# Altium PCB MCPS Power 030307.PcbDoc
Units mm, origin at the board's own origin, x right, y up, seen from the top; angles counter-clockwise.
Board outline 144.17 x 67.63 mm, 2 copper layers (Top Layer, Bottom Layer); 51 components, 23 nets, 114 pads, 4 vias.
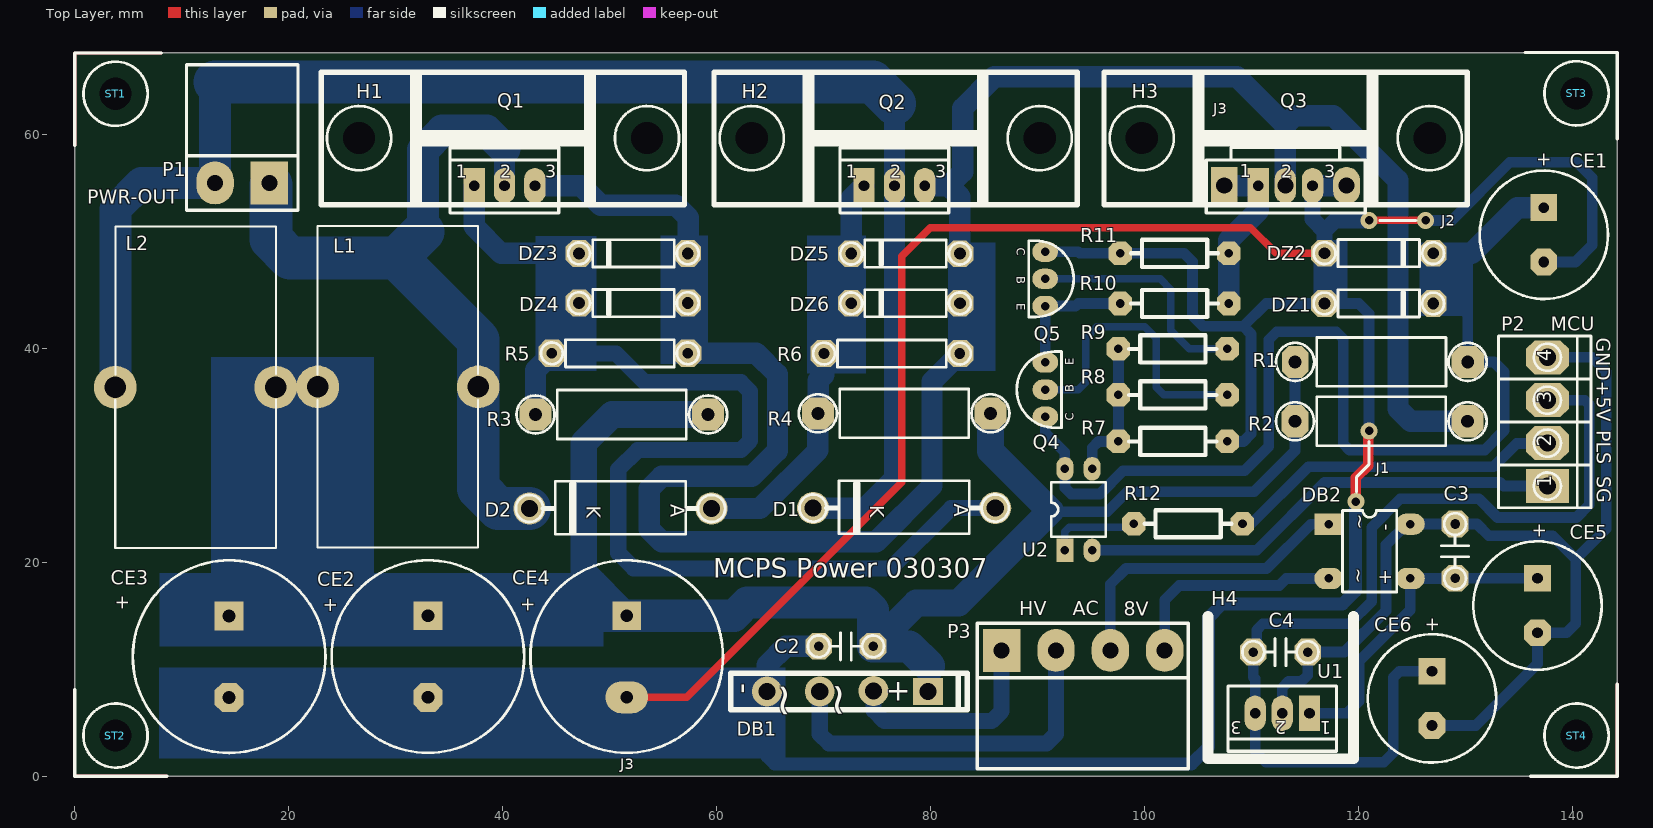
[diagram p0: Top Layer view]
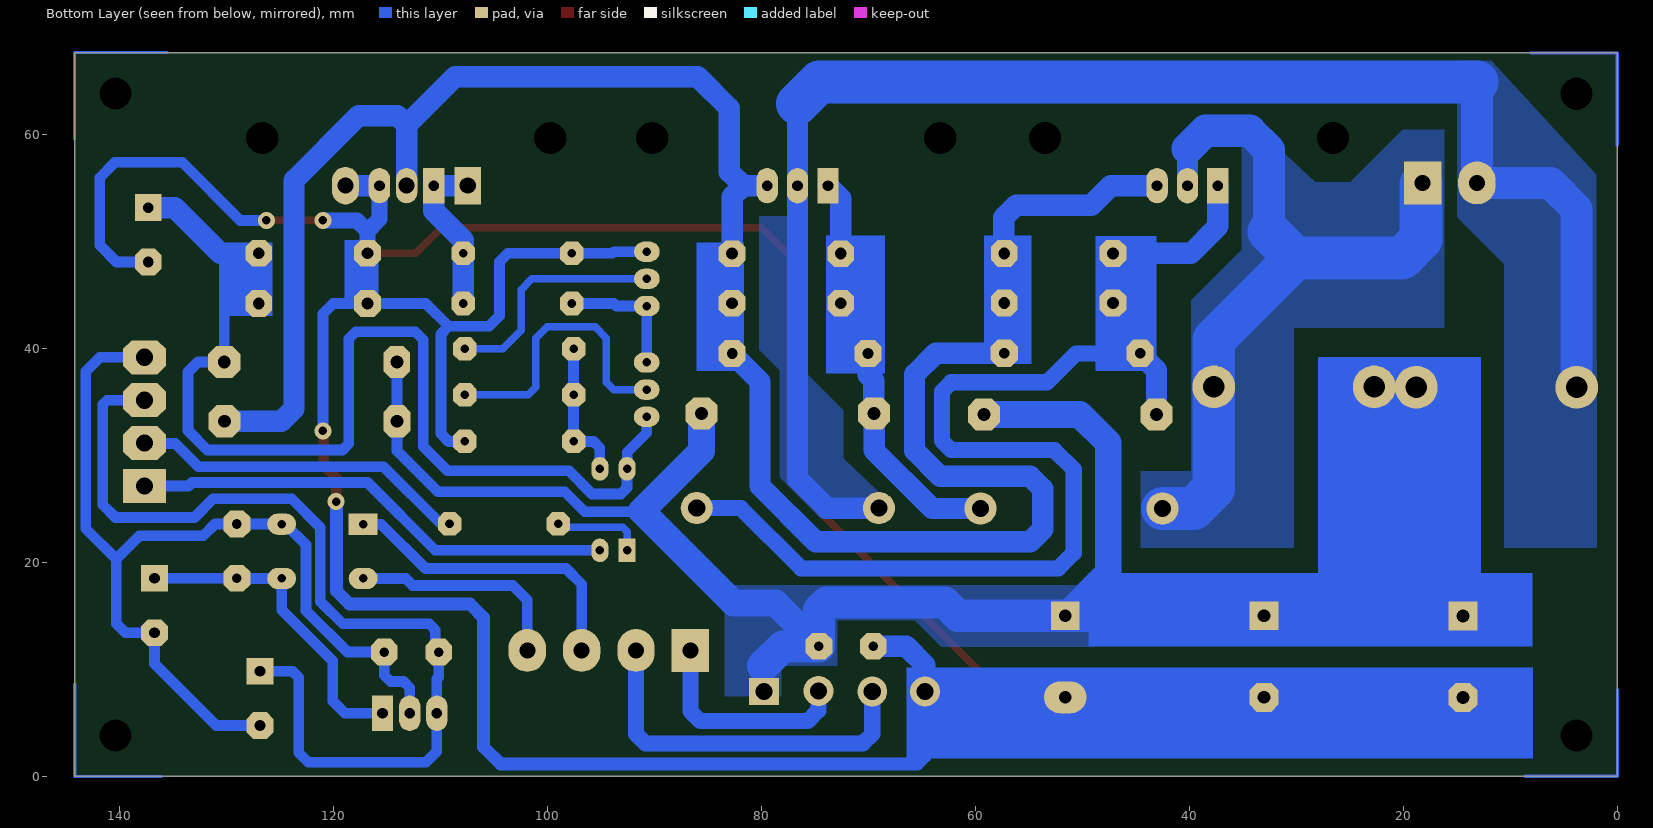
[diagram p1: Bottom Layer view, seen from below]

## Layer stack, top to bottom
Top Solder: solder mask 0.0102, Solder Resist, Dk 3.5
Top Layer: signal copper 0.0356
Dielectric1: dielectric 0.32, FR-4, Dk 4.8
Bottom Layer: signal copper 0.0356
Bottom Solder: solder mask 0.0102, Solder Resist, Dk 3.5

## Board outline
0,-0.01 0,67.62 144.17,67.62 144.17,-0.01

## Design rules (kind name [scope] priority, off if disabled: settings)
Clearance [All] p1: gap=0.3 ignorepadtopadclearanceinfootprint=FALSE
ComponentClearance [All] p1 off: gap=0.254 collisioncheckmode=3 verticalgap=0.254 showdistances=FALSE
PolygonConnect [All] p1: connectstyle=Direct reliefconductorwidth=1 reliefentries=4 polygonreliefangle="90 Angle" airgapwidth=0.3
RoutingVias [All] p1: holewidth=0.711 width=1.27 viastyle="Through Hole" minholewidth=0.711 minwidth=1.27 maxholewidth=0.711 maxwidth=1.27
SilkToSolderMaskClearance SilkscreenOverComponentPads [IsPad] p1: minsilkscreentomaskgap=0.254 clearancetoexposedcopper=TRUE
SolderMaskExpansion [All] p1: expansion=0.102 istentingtop=FALSE
UnRoutedNet [All] p1: checkbadconnections=TRUE
Width [All] p1: maxlimit=5 minlimit=0.3 preferedwidth=0.7 minimp=50.000000 maximp=50.000000 favimp=50.000000
27 further rules are at their usual default settings.

## Components (designator, comment, footprint, x,y, rotation, side; value= is the part's Value field where it differs from the comment)
C2 "100N" c2P 74.62,12.15 r180 top
C3 "100N" c2P 129.01,18.5 r90 top
C4 "100N" c2P 110.15,11.61 r0 top
CE1 "470M/25" cap2p12 137.33,53.15 r0 top
CE2 "4700M/50" CAP3P5#1 33.01,14.85 r0 top
CE3 "4700M/50" CAP3P5#1 14.43,14.838 r0 top
CE4 "4700M/50" CAP3P5#2 51.59,14.85 r0 top
CE5 "1000M/25" cap2p12 136.735,18.5 r0 top
CE6 "220M/25" cap2p12 126.88,9.82 r0 top
D1 "1N5822" D54 86.03,25.07 r270 top
D2 "1N5822" D54 59.52,25.03 r270 top
DB1 "4Amp" "BRG GBU" 64.703,7.93 r270 top
DB2 "4Amp" "BRG F" 121.02,21.03 r90 top
DZ1 "18V" D4P 116.801,44.191 r180 top
DZ2 "18V" D4P 116.801,48.89 r180 top
DZ3 "18V" D4P 57.297,48.872 r0 top
DZ4 "18V" D4P 57.297,44.232 r0 top
DZ5 "18V" D4P 82.73,48.85 r0 top
DZ6 "18V" D4P 82.73,44.21 r0 top
H1 "HeatSink-Q1" heatsink2 56.957,65.782 r90 top
H2 "HeatSink-Q2" heatsink2 93.66,65.782 r90 top
H3 "HeatSink-Q3" heatsink2 130.109,65.782 r90 top
H4 "HeatSink-U1" heatsink5 115.282,5.977 r180 top
L1 "100uH/1A" Inductor-Brown 37.681,29.684 r90 top
L2 "100uH/1A" Inductor-Brown 3.819,43.066 r270 top
P1 "120Vpp/10KHz" 2EDG 19.24,75.409 r0 top
P2 "MCU" DSIP4 137.64,27.124 r180 top
P3 "40,8 Vac" 4EDG 86.63,11.76 r180 top
Q1 "" TO220T#1 37.626,55.198 r0 top
Q2 "IRFP4568" TO220T#2 74.075,55.198 r0 top
Q3 "" TO220T#3 110.61,55.2 r0 top
Q4 "BC337" CBE-BC546 90.71,38.68 r180 top
Q5 "BC327" CBE-BC546 90.7,43.95 r0 top
R1 "1K/1W" w1#1 122.125,38.73 r0 top
R2 "2K2/1W" w1#1 122.114,33.18 r0 top
R3 "2K2/1W" w1#2 51.134,33.816 r180 top
R4 "2K2/1W" w1#2 77.523,33.921 r180 top
R5 "10K" R5P 44.597,39.533 r0 top
R6 "10K" R5P 82.73,39.51 r180 top
R7 "2K2" R4P 97.55,31.3 r90 top
R8 "220R" R4P 97.55,35.64 r90 top
R9 "220R" R4P 97.55,39.94 r90 top
R10 "47R" R4P 97.71,44.19 r90 top
R11 "10K" R4P 97.71,48.88 r90 top
R12 "470R" R4P 109.14,23.6 r270 top
ST1 "STUD" CORNER 0.01,67.6 r0 top
ST2 "STUD" CORNER 0,0 r90 top
ST3 "STUD" CORNER 144.17,67.64 r270 top
ST4 "STUD" CORNER 144.17,0 r180 top
U1 "LM7805" TO220T#4 115.4,5.89 r180 top
U2 "PC817" DIP4 92.55,21.12 r90 top

## Footprints (in the part's own frame and the unit in brackets; to place one, negate y for a bottom-side part, rotate by r counter-clockwise, add the part's x,y. Pads: shape width x height; smd on the part's side, far side on the other; paste and mask are expansions set on the pad)
2EDG [mm]
  rect 3.5x4 hole 1.5: 1(-1.045,-19.957)
  oval 3.5x4 hole 1.5: 2(-6.125,-19.957)
  silkscreen extent -8.79,-22.5 1.62,-8.91
4EDG [mm]
  rect 3.5x4 hole 1.5: 1(0,0)
  oval 3.5x4 hole 1.5: 2(-5.08,0) 3(-10.16,0) 4(-15.24,0)
  silkscreen extent -17.44,-2.54 2.29,11.05
"BRG F" [mm]
  rect 2x2.7 hole 0.8: 1(2.54,3.81)
  oval 2x2.7 hole 0.8: 2(2.54,-3.81) 3(-2.54,3.81) 4(-2.54,-3.81)
  silkscreen extent -3.81,-2.54 3.81,2.54
"BRG GBU" [mm]
  round 2.8 hole 1.6: 1(0,4.928) 2(0,0) 3(-0.051,9.957)
  rect 2.5x2.8 hole 1.6: 4(0,15.037)
  silkscreen extent -1.7,-3.41 1.7,18.69
c2P [mm]
  oct 2.5x2.5 hole 0.9: 1(0,0) 2(5.08,0)
  silkscreen extent -1.02,-1.27 6.09,1.27
cap2p12 [mm]
  rect 2.5x2.5 hole 1: 1(-0.025,0)
  oct 2.5x2.5 hole 1: 2(-0.025,-5.08)
  silkscreen extent -6.02,-8.54 5.97,3.46
CAP3P5#1 [mm]
  rect 2.7x2.7 hole 1.2: 1(0,0.152)
  oct 2.7x2.7 hole 1.2: 2(0,-7.468)
  silkscreen extent -9,-12.66 9,5.34
CAP3P5#2 [mm]
  rect 2.7x2.7 hole 1.2: 1(0,0.152)
  oval 4x3 hole 1.2: 2(0,-7.468)
  silkscreen extent -9,-12.66 9,5.34
CBE-BC546 [mm]
  oval 2.4x1.9 hole 0.8: 1(0,2.54) 2(0,0) 3(0,5.08)
  silkscreen extent -1.52,-1.02 2.67,6.1
CORNER [mm]
  round 2 hole 3: 1(3.81,-3.81)
  Multi-Layer lines w0.3: 0,-8.623 0,0.013 8.09,0.013
  silkscreen extent 0,-8.62 8.09,0.01
D4P [mm]
  oct 2.5x2.5 hole 1.1: 1(0,0) 2(-10.16,0)
  silkscreen extent -11.18,-1.27 1.01,1.27
D54 [mm]
  round 3 hole 1.6: 1(0,0) 2(0,-17.018)
  silkscreen extent -2.54,-18.28 2.41,1.27
DIP4 [mm]
  rect 2.2x1.6 hole 0.8: 1(0,0)
  oval 2.2x1.6 hole 0.8: 2(0,-2.54) 3(7.62,-2.54) 4(7.62,0)
  silkscreen extent 1.27,-3.81 6.35,1.27
DSIP4 [mm]
  rect 4x3.175 hole 1.6: 1(0,0)
  oct 4x3.175 hole 1.6: 2(0,-4.013) 3(0,-8.026) 4(0,-12.04)
  silkscreen extent -4.06,-14.02 4.57,2.03
heatsink2 [mm]
  round 0 hole 3: 5(-6.139,30.38) 5(-6.139,3.47)
  silkscreen extent -12.37,-0.04 0.03,33.91
heatsink5 [mm]
  silkscreen extent -4.23,-8.97 9.37,4.33, body extent -3.88,-8.83 9.33,3.87, height 20.32
Inductor-Brown [mm]
  round 4 hole 2: 1(6.706,14.961) 2(6.706,-0.025)
  silkscreen extent -8.3,-0.03 21.74,15
R4P [mm]
  oct 2.2x2.2 hole 0.8: 1(0,0) 2(0,-10.16)
  silkscreen extent -1.27,-9.14 1.27,-1.02
R5P [mm]
  oct 2.54x2.54 hole 1: 1(0,0) 2(12.7,0)
  silkscreen extent -1.01,-1.27 13.72,1.27
TO220T#1 [mm]
  rect 2x3.3 hole 1: 1(-0.296,0.002)
  oval 2x3.3 hole 1: 2(2.54,0) 3(5.384,0.002)
  silkscreen extent -2.54,-2.54 7.62,3.56
TO220T#2 [mm]
  rect 2x3.3 hole 1: 1(-0.305,0.002)
  oval 2x3.3 hole 1: 2(2.54,0) 3(5.375,0.002)
  silkscreen extent -2.54,-2.54 7.62,3.56
TO220T#3 [mm]
  rect 2x3.3 hole 1: 1(0,0)
  oval 2x3.3 hole 1.5: 2(2.54,0)
  oval 2x3.3 hole 1: 3(5.08,0)
  silkscreen extent -4.86,-2.54 10.01,3.56
TO220T#4 [mm]
  rect 2x3.3 hole 1: 1(0,0)
  oval 2x3.3 hole 1: 2(2.54,0) 3(5.08,0)
  silkscreen extent -2.54,-2.54 7.62,3.56
w1#1 [mm]
  oct 2.5x3 hole 1.2: 1(-8.064,0)
  oct 3x3 hole 1.2: 2(8.064,0)
  silkscreen extent -9.84,-2.29 9.84,2.29
w1#2 [mm]
  oct 3x3 hole 1.2: 1(-8.064,0) 2(8.064,0)
  silkscreen extent -9.84,-2.29 9.84,2.29

## Part data
C2 C3 C4: library part C
CE1 CE2 CE3 CE4 CE5 CE6: library part E
D1 D2: library part D
DB1 DB2: library part BRIDGE
DZ1 DZ2 DZ3 DZ4 DZ5 DZ6: library part DZ
H1 H2 H3 H4 P1: library part "Header 2", "Header, 2-Pin", LatestRevisionDate=17-Jul-2002, LatestRevisionNote="Re-released for DXP Platform.", Publisher="Altium Limited"
L1 L2: library part INDUCTOR
P2 P3: library part "Header 4", "Header, 4-Pin", LatestRevisionDate=17-Jul-2002, LatestRevisionNote="Re-released for DXP Platform.", Publisher="Altium Limited"
Q1 Q2 Q3: library part "MOSFET N"
Q4: library part BC546
Q5: library part M6, "PNP", DatasheetVersion=1997, LatestRevisionDate=15-Jan-2003, LatestRevisionNote="PCB Footprint 'BCY-W3/D4.7' replaced", PackageDescription="TO, Flat Index; 3 In-Line, Axial Leads; Body Dia. 4.5mm; Leads 0.51 x 0.48 mm (max)", PackageReference=TO-92A, PackageVersion=Sep-1998, Published=8-Jun-2000, Publisher="Altium Limited"
R1 R2 R3 R4 R5 R6 R7 R8 R9 R10 R11 R12: library part R
U1: library part Regulator, "SMD"
U2: library part OPTODIP4

## Free pads (board coordinates)
  rect 2.5x3.5 hole 1.5: 2(107.435,55.2)
  oval 2.5x3.5 hole 1.5: 3(118.865,55.2)

## Via types
v1: diameter 1.6, hole 0.8, Top Layer to Bottom Layer, 4 vias

## Nets (pads, with @x,y where several pads share a name; then routed paths per layer and width w, separated by ;. In a path a pad name is that pad's centre, name@x,y a point inside that pad or via, vN(x,y) a via of type N, cw(c..) or ccw(c..) an arc to the next point about the centre after c; other vN are vias at no path point)
5V: C4.1 CE6.1 P2.3 U1.3 | length 91
  Bottom Layer w1: 110.32,2.3 110.32,2.334 ; CE6.1 123.816,9.82 123.23,9.234 123.23,2.2 122.34,1.31 111.344,1.31 110.32,2.334 ; P2.3 141.14,35.15 141.55,34.74 141.55,25.38 140.36,24.19 132.976,24.19 131.236,25.93 123.88,25.93 121.21,23.26 121.21,16.34 119.12,14.25 111.048,14.25 110.462,13.664 110.462,11.922 C4.1 110.15,9.29 110.32,9.12 U1.3 110.32,2.334
16V: CE1.1 DZ1.2 DZ2.2 Q4.3 R1.2 U2.4 | length 106
  Bottom Layer w1: Q4.3 90.71,32.1 92.534,30.276 92.534,28.756 U2.4 92.55,26.976 93.136,26.39 95.82,26.39 97.98,28.55 109.32,28.55 111.6,30.83 111.6,40.79 112.35,41.54 117.917,41.54 118.56,40.897 118.56,31.086 119.146,30.5 131.77,30.5 133.58,32.31 133.58,37.79 132.64,38.73 R1.2 130.19,43.16 129.159,44.191 DZ1.2
  Bottom Layer w2: DZ1.2 DZ2.2 130.56,48.89 134.82,53.15 CE1.1
AC1: DB1.3 P3.1 | length 20.3
  Bottom Layer w1.5: DB1.3 74.66,6.168 75.678,5.15 85.69,5.15 86.63,6.09 P3.1
AC2: DB1.1 P3.2 | length 34.6
  Bottom Layer w1.5: DB1.1 69.631,3.949 70.509,3.07 90.831,3.07 91.71,3.949 P3.2
AC3: DB2.1 P3.3 | length 28.9
  Bottom Layer w1: P3.3 96.79,17.95 98.26,19.42 111.387,19.42 115.537,23.57 DB2.1
AC4: DB2.3 P3.4 | length 20.9
  Bottom Layer w1: P3.4 101.87,16.47 103.24,17.84 112.57,17.84 113.22,18.49 DB2.3
GND: C2.2 CE1.2 CE2.2 CE3.2 CE4.2 DB1.2 DZ1.1 DZ2.1 pad.3 Q3.3 Q5.3 R7.2 R11.1 | length 361.6
  Top Layer w0.7: CE4.2 57.192,7.382 77.31,27.5 77.31,48.62 79.97,51.28 109.89,51.28 112.28,48.89 DZ2.1 ; v1@120.97,51.95 v1(126.25,51.95)
  Top Layer w1: v1(119.74,25.68) 119.74,27.911 120.885,29.055 120.885,32.205 v1(120.97,32.29)
  Bottom Layer w0.7: DB1.2@64.693,7.94 DB1.2
  Bottom Layer w1: Q5.3 93.77,49.03 93.92,48.88 R11.1 103.67,48.88 104.46,48.09 104.46,43.04 105.45,42.05 109.22,42.05 ; R7.2 109.227,31.3 109.94,32.013 109.94,41.33 109.22,42.05 ; v1(120.97,32.29) 120.97,43.22 119.999,44.191 DZ1.1 111.361,44.191 109.22,42.05 ; v1(126.25,51.95) 128.69,51.95 134.13,57.39 140.4,57.39 141.84,55.95 141.84,49.65 140.26,48.07 CE1.2
  Bottom Layer w1.2: DB1.2@64.693,7.94 64.693,1.843 65.396,1.14 104.36,1.14 105.953,2.733 105.953,14.827 107.236,16.11 118.5,16.11 119.71,17.32 v1@119.71,25.68
  Bottom Layer w1.5: Q3.3 115.69,52.072 116.801,50.961 ; DZ2.1 116.801,50.961 ; v1@120.97,51.95 117.79,51.95 116.801,50.961
  Bottom Layer w2: DB1.2 64.703,10.393 66.461,12.15 C2.2 ; Q3.3 pad.3 ; DZ1.1 DZ2.1
  Bottom Layer w3: CE3.2 CE2.2@32.998,7.37 ; CE2.2@33.022,7.37 CE4.2@51.578,7.37 ; CE4.2 60.532,7.382 61.09,7.94 DB1.2@64.693,7.94
  other v1: 120.97,51.96
GND1: C3.2 C4.2 CE5.2 CE6.2 DB2.2 P2.4 U1.2 | length 92.2
  Bottom Layer w1: U1.2 112.86,8.274 113.446,8.86 114.644,8.86 115.23,9.446 C4.2 118.68,11.61 122.55,15.48 122.55,21.64 124.48,23.57 DB2.2 ; DB2.2@124.84,23.58 C3.2 131.06,23.58 132.16,22.48 138.11,22.48 140.29,20.3 ; CE6.2 130.945,4.74 136.715,10.51 136.715,13.42 139.43,13.42 140.29,14.28 140.29,20.3 ; P2.4 141.807,39.163 143.13,37.84 143.13,23.14 140.29,20.3
HV: C2.1 CE2.1 CE3.1 CE4.1 DB1.4 L1.1 L2.1 R1.1 R2.1 R3.1 R4.1 | length 197.1
  Bottom Layer w0.7: CE3.1 CE3.1@14.43,15 ; DB1.4 DB1.4@79.83,8.02
  Bottom Layer w1: 91.28,24.72 96.5,24.72 98.37,26.59 110.22,26.59 114.055,30.425 114.055,33.18 R1.1@114.055,38.73
  Bottom Layer w2: DB1.4@79.83,8.02 79.83,10.303
  Bottom Layer w2.5: CE4.1 47.57,19.022 47.57,31.15 50.236,33.816 R3.1 ; C2.1 78.66,16.19 82.59,16.19 91.2,24.8 85.587,30.413 R4.1
  Bottom Layer w3: CE3.1 CE2.1@32.998,14.99 ; CE3.1@14.43,15 14.43,25.43 18.78,29.78 L2.1 18.795,36.375 22.705,36.375 L1.1 ; CE2.1@33.022,14.99 CE4.1@51.578,14.99 ; CE4.1 61.602,15.002 62.86,16.26 73.91,16.26 74.62,15.55 C2.1 77.983,12.15 79.83,10.303
NetC3_1: C3.1 CE5.1 DB2.4 U1.1 | length 30.4
  Bottom Layer w0.7: DB2.4 DB2.4@124.835,18.495 ; C3.1@128.525,18.495 C3.1@128.53,18.5
  Bottom Layer w1: U1.1@115.403,5.893 118.915,5.893 120.065,7.043 120.065,10.785 124.83,15.55 DB2.4 ; DB2.4@124.835,18.495 C3.1@128.525,18.495 ; C3.1@128.53,18.5 C3.1 CE5.1
NetD1_1: D1.1 DZ3.2 DZ4.2 Q1.1 R3.2 R5.1 | length 116.4
  Bottom Layer w0.7: DZ4.2@47.023,44.118 DZ4.2@47.042,44.137
  Bottom Layer w1.5: R5.1 50.58,39.533 53.283,36.83 62.251,36.83 63.13,35.951 63.13,31.369 62.251,30.49 52.6,30.49 50.8,28.69 50.8,20.88 52.24,19.44 76.27,19.44 81.9,25.07 D1.1
  Bottom Layer w2: Q1.1 37.33,51.39 39.848,48.872 DZ3.2 DZ4.2 ; R3.2 43.069,37.956 R5.1@44.622,39.508 ; R5.1 44.597,43.697 45.018,44.118 DZ4.2@47.023,44.118
NetD1_2: D1.2 L2.2 P1.2 Q2.2 | length 144.5
  Bottom Layer w2: D1.2 73.87,25.07 76.615,27.815 76.615,62.865
  Bottom Layer w3: L2.2 3.794,52.994 6.252,55.452 P1.2 13.115,64.89
  Bottom Layer w4: 13.115,64.89 74.59,64.89 76.615,62.865
NetD2_1: D2.1 DZ5.2 DZ6.2 Q2.1 R4.2 R6.2 | length 39.6
  Bottom Layer w2: D2.1 64.03,25.03 69.458,30.458 R4.2 ; R4.2@69.489,33.921 69.489,36.99 70.03,37.53 R6.2 71.51,39.51 72.57,40.57 DZ6.2 DZ5.2 72.57,54 Q2.1
NetD2_2: D2.2 L1.2 P1.1 Q1.2 | length 71.5
  Bottom Layer w2: Q1.2 40.166,58.654
  Bottom Layer w3: 32.55,50.9 32.55,58.53 34.35,60.33 38.49,60.33 40.166,58.654
  Bottom Layer w4: P1.1@18.35,55.297 18.35,50.187 20.107,48.43 30.08,48.43 ; 32.55,50.9 30.08,48.43 ; D2.2 39.58,25.03 37.706,26.904 37.706,40.804 30.08,48.43
NetP2_1: P2.1 U2.2 | length 45.3
  Bottom Layer w1: U2.2 110.47,21.12 116.8,27.45 133.2,27.45 133.526,27.124 P2.1
NetP2_2: P2.2 R12.1 | length 31.6
  Bottom Layer w1: R12.1 109.97,23.6 115.31,28.94 132.6,28.94 134.761,31.101 137.604,31.101 P2.2
NetQ3_1: pad.2 Q3.1 R10.2 R11.2 | length 15.3
  Bottom Layer w2: pad.2 Q3.1 110.61,52.85 107.87,50.11 R11.2 R10.2
NetQ4_1: Q4.1 R8.2 | length 27.2
  Bottom Layer w0.7: Q4.1 93.802,36.14 94.48,36.818 94.48,40.96 95.52,42 100.02,42 101.08,40.94 101.08,36.36 101.8,35.64 R8.2
NetQ4_2: Q4.2 Q5.2 R10.1 | length 12.4
  Bottom Layer w1: Q4.2@90.704,38.68 90.704,43.95 93.54,43.95 93.78,44.19 R10.1
NetQ5_1: Q5.1 R9.2 | length 22
  Bottom Layer w0.7: Q5.1 101.44,46.49 102.45,45.48 102.45,41.67 104.18,39.94 R9.2
NetR7_1: R7.1 R8.1 R9.1 U2.3 | length 13.3
  Bottom Layer w1: U2.3 95.09,30.714 95.676,31.3 R7.1 ; R7.1@97.55,31.34 R8.1 R9.1
NetR12_2: R12.2 U2.1 | length 8.5
  Bottom Layer w0.7: U2.1 92.55,22.86 92.97,23.28 98.66,23.28 R12.2
PGND: DZ3.1 DZ4.1 DZ5.1 DZ6.1 Q1.3 Q2.3 Q3.2 R2.2 R5.2 R6.1 | length 211.2
  Bottom Layer w2: Q1.3 47.34,55.2 49.17,53.37 56.188,53.37 57.36,52.198 57.36,48.935 DZ3.1 DZ4.1 R5.2 63.707,39.533 65.68,37.56 65.68,30.443 63.267,28.03 54.874,28.03 53.702,26.858 53.702,23.082 54.874,21.91 74.9,21.91 80.12,27.13 80.12,36.9 R6.1 DZ6.1 DZ5.1 82.73,54.163 81.695,55.198 ; Q2.3 79.45,55.198 81.695,55.198 ; Q3.2 113.15,60.87 ; R2.2 124.852,33.18 123.68,34.352 123.68,55.69 117.62,61.75 114.03,61.75 113.15,60.87 ; 81.695,55.198 82.98,56.483 82.98,62.42 85.95,65.39 108.63,65.39 113.15,60.87
pads on no net: H1.5 H2.5 H3.5 ST1.1 ST2.1 ST3.1 ST4.1

## Polygon pours and split planes (outlines as drawn)
NetD1_2 on Bottom Layer "NONET_L-01_P-001" (solid, pour order 3): 75.66,52.35 80.17,52.35 80.17,39.85 78.28,37.96 78.28,27.95 74.4,24.07 69.09,24.07 69.09,26.61 72.35,29.719 72.35,34.21 75.66,37.52
HV on Bottom Layer "NONET_L-01_P-001" (solid, pour order 4): 48.82,17.859 83.435,17.859 83.435,7.47 78.114,7.47 78.114,10.33 72.92,10.33 72.92,14.59 65.68,14.59 63.18,12.09 63.15,12.12 48.82,12.12
NetD2_2 on Bottom Layer "NONET_L-01_P-001" (solid, pour order 2): 30.25,54.06 30.25,21.36 44.52,21.36 44.52,28.49 39.83,28.49 39.83,42.92 39.83,44.48
NetD2_2 on Bottom Layer "NONET_L-01_P-001" (solid, pour order 1): 16.158,60.45 20.04,60.45 24.96,55.53 28.22,55.53 32.311,59.29 35.086,59.29 35.086,41.91 16.158,41.91
NetD1_2 on Bottom Layer "NONET_L-01_P-001" (solid, pour order 0): 1.927,21.38 10.58,21.38 10.58,47.84 14.98,52.24 14.98,66.87 11.794,66.87 1.961,56.201

## Other copper
Bottom Layer:
  rectangle net GND: 116.37,43.73 118.94,50.14
  rectangle net 16V: 125.691,43 130.68,49.906
  region net PGND: 86.077,49.872 81.627,49.872 81.627,37.892 86.077,37.892
  rectangle net PGND: 54.75,38.55 59.2,50.53
  rectangle net NetD2_1: 68.46,37.642 73.94,50.53
  rectangle net NetD1_1: 43.047,37.902 48.747,50.5
  rectangle net HV: 7.92,12.12 49.43,18.98
  rectangle net HV: 12.72,18.1 27.99,39.19
  rectangle net GND: 7.9,1.68 66.41,10.16

## Silkscreen, mask and mechanical layers (free items; w line width, h text height)
Top Overlay:
  circle w0.254: c126.639,59.643 r3
  circle w0.254: c99.729,59.643 r3
  circle w0.254: c90.19,59.643 r3
  circle w0.254: c63.28,59.643 r3
  circle w0.254: c53.487,59.643 r3
  circle w0.254: c26.577,59.643 r3
  lines w0.254: 121.97,51.95 123.25,51.95 125.36,51.95
  lines w0.3: 119.807,26.57 119.807,27.978 120.96,29.131 120.96,31.29
  text "J3" at 106.4,61.9 h1
  text "PWR-OUT" at 1.16,53.52 h1.3
  text "J2" at 127.71,51.47 h1
  text "MCU" at 137.93,41.66 h1.3
  text "GND" at 142.2,40.98 h1.3 r270
  text "+5V" at 142.24,36.97 h1.3 r270
  text "PLS" at 142.24,32.32 h1.3 r270
  text "J1" at 121.61,28.33 h1
  text "SG" at 142.26,28.03 h1.3 r270
  text "MCPS Power 030307" at 59.69,18.58 h1.8
  text "HV" at 88.28,15.03 h1.3
  text "AC" at 93.26,15.03 h1.3
  text "8V" at 98.06,15.01 h1.3
  text "J3" at 50.97,0.66 h1
Mechanical 1:
  the board outline again, w0.3

## Text inside footprints (layer, text, board x,y; h text height)
CE1: Top Overlay "+" at 136.8,58.36 h1.3 r270
CE2: Top Overlay "+" at 23.36,16.75 h1.3 r270
CE3: Top Overlay "+" at 3.94,16.97 h1.3 r270
CE4: Top Overlay "+" at 41.83,16.8 h1.3 r270
CE5: Top Overlay "+" at 136.38,23.68 h1.3 r270
CE6: Top Overlay "+" at 126.35,14.92 h1.3 r270
D1: Top Overlay "A" at 82.22,25.451 h1.3 r270; Top Overlay "K" at 74.346,25.324 h1.3 r270
D2: Top Overlay "A" at 55.71,25.411 h1.3 r270; Top Overlay "K" at 47.836,25.284 h1.3 r270
DB1: Top Overlay "~" at 65.008,8.794 h3 r270; Top Overlay "~" at 70.088,8.844 h3 r270; Top Overlay "-" at 61.706,8.717 h2 r270; Top Overlay "+" at 78.114,8.794 h2 r180
DB2: Top Overlay "~" at 120.512,17.982 h1.3 r90; Top Overlay "~" at 120.639,23.062 h1.3 r90; Top Overlay "-" at 123.052,22.935 h1.3 r90; Top Overlay "+" at 123.052,17.855 h1.3 r90
P2: Top Overlay "1" at 138.021,26.997 h1.3 r90; Top Overlay "2" at 138.021,30.807 h1.3 r90; Top Overlay "3" at 138.021,34.871 h1.3 r90; Top Overlay "4" at 138.021,38.808 h1.3 r90
Q1: Top Overlay "2" at 39.785,55.96 h1.2; Top Overlay "1" at 35.594,55.96 h1.2; Top Overlay "3" at 43.976,55.96 h1.2
Q2: Top Overlay "3" at 80.425,55.96 h1.2; Top Overlay "1" at 72.043,55.96 h1.2; Top Overlay "2" at 76.234,55.96 h1.2
Q3: Top Overlay "2" at 112.769,55.962 h1.2; Top Overlay "1" at 108.886,55.972 h1.2; Top Overlay "3" at 116.786,55.932 h1.2
Q4: Top Overlay "B" at 93.377,35.886 h0.8 r90; Top Overlay "E" at 93.377,38.426 h0.8 r90; Top Overlay "C" at 93.377,33.219 h0.8 r90
Q5: Top Overlay "B" at 88.033,46.744 h0.8 r270; Top Overlay "E" at 88.033,44.204 h0.8 r270; Top Overlay "C" at 88.033,49.411 h0.8 r270
U1: Top Overlay "2" at 113.241,5.128 h1.2 r180; Top Overlay "1" at 117.432,5.128 h1.2 r180; Top Overlay "3" at 109.05,5.128 h1.2 r180